# Altium PCB PiMX8MP_r0.3.PcbDoc (part 8 of 10)
Units mm, origin at the board's own origin, x right, y up, seen from the top; angles counter-clockwise.
Board outline 55 x 40 mm, 10 copper layers (Top Layer, Layer 1, Layer 2, Layer 3, Layer 4, Layer 5, Layer 6, Layer 7, Layer 8, Bottom Layer), stack 1.472 mm thick; 545 components, 477 nets, 2606 pads, 2278 vias.
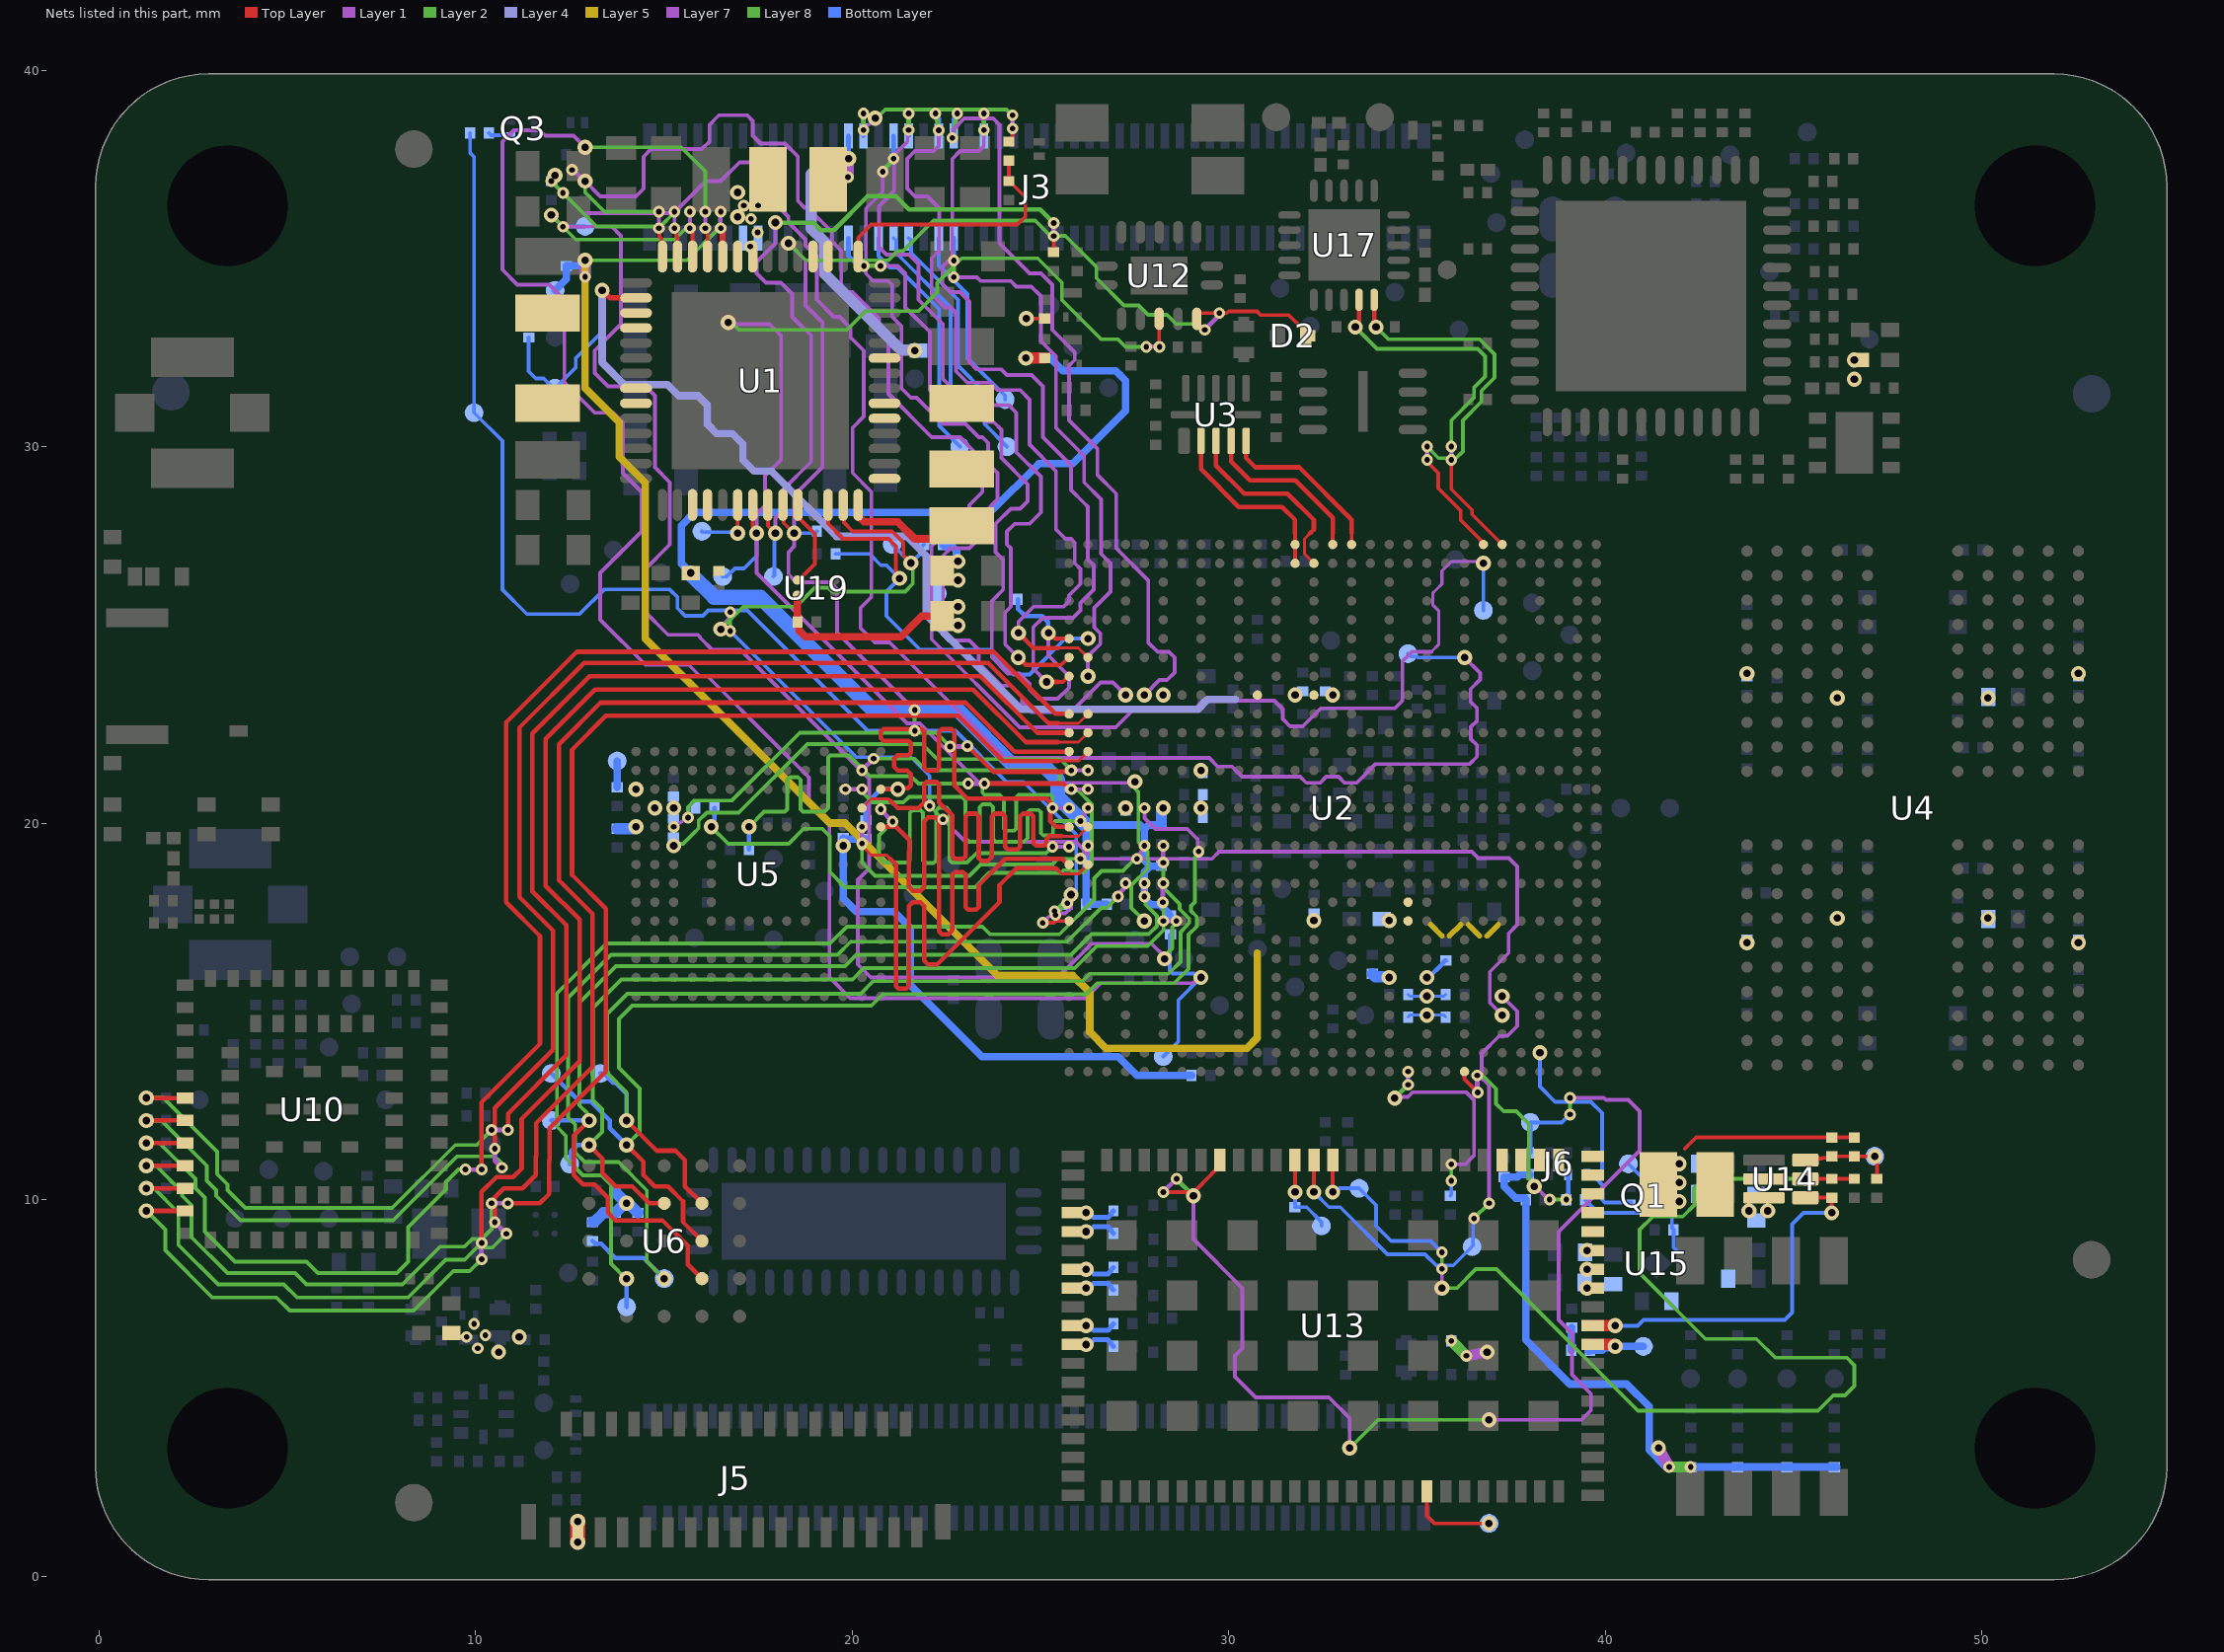
[diagram p16: the nets of this part, all layers, seen from the top]

## Via types
v1: diameter 0.4, hole 0.2, Top Layer to Bottom Layer, tented both sides, 946 vias
v2: diameter 0.31, hole 0.15, Top Layer to Layer 1, tented both sides, 321 vias
v3: diameter 0.31, hole 0.15, Layer 8 to Bottom Layer, tented both sides, 315 vias
v4: diameter 0.31, hole 0.15, Layer 1 to Layer 2, tented both sides, 257 vias
v5: diameter 0.31, hole 0.15, Layer 7 to Layer 8, tented both sides, 198 vias
v6: diameter 0.4, hole 0.2, Layer 2 to Layer 7, tented both sides, 169 vias
v7: diameter 0.31, hole 0.15, Top Layer to Layer 1, tented top, 72 vias

## Nets (pads, with @x,y where several pads share a name; then routed paths per layer and width w, separated by ;. In a path a pad name is that pad's centre, name@x,y a point inside that pad or via, vN(x,y) a via of type N, cw(c..) or ccw(c..) an arc to the next point about the centre after c; other vN are vias at no path point) (continued)
PMIC_32K_OUT: TP10.TP U1.7 U2.J25 U12.11 | length 41.5
  Top Layer w0.1: U1.7@17.362,28.454 17.362,27.886 17.462,27.786 v1(17.462,27.704) ; U12.11@28.153,33.399 28.153,32.664 v2(28.162,32.654)
  Layer 1 w0.12: v4(27.812,32.654) v2(28.162,32.654)
  Layer 2 w0.1: v6(16.712,33.304) 16.793,33.304 16.993,33.104 19.862,33.104 20.362,33.604 21.762,33.604 22.262,34.104 22.262,34.354 22.912,35.004 24.929,35.004 25.571,34.363 25.571,33.896 26.612,32.854 27.062,32.854 27.262,32.654 v4(27.812,32.654) ; v6@27.512,21.004 27.512,20.923 27.6,20.835 27.6,19.5 27.85,19.25 27.85,18.792 27.412,18.354 27.412,17.754 v1(27.762,17.404)
  Layer 7 w0.1: v6(16.712,33.304) 16.762,33.254 17.812,33.254 18.112,32.954 18.112,29.654 17.687,29.229 17.687,28.429 17.462,28.204 v1(17.462,27.704) 17.462,26.654 21.462,22.654 21.796,22.654 23.376,21.074 25.462,21.074 27.482,21.074 v6(27.512,21.104)
  Bottom Layer w0.1: TP10.TP@16.562,26.554 16.67,26.554 16.888,26.772 17.13,26.772 17.462,27.104 v1(17.462,27.704)
PMIC_INT_B: R4.2 TP11.TP U1.13 U2.D6 | length 40.1
  Top Layer w0.1: U1.13@19.762,28.454 19.782,28.435 19.782,27.985 20.012,27.754 21.062,27.754 21.362,27.454 21.362,27.113 v1(21.562,26.913)
  Layer 2 w0.1: v6(16.512,25.154) 17.112,25.754 18.512,25.754 19.012,26.254 19.362,26.254 19.462,26.154 21.407,26.154 21.612,26.359 21.612,26.863 v1(21.562,26.913)
  Layer 7 w0.1: v6(16.512,25.154) 16.512,25.225 16.725,25.437 16.725,25.567 v5(16.765,25.607) ; v5(22.412,20.104) 23.012,19.504 25.462,19.504 25.946,19.504 26.396,19.054 29.554,19.054 29.744,19.244 36.456,19.244 36.626,19.074 37.442,19.074 37.662,18.854 37.662,17.304 37.432,17.074 37.432,16.554 36.932,16.054 36.932,15.234 v1(37.262,14.904)
  Layer 8 w0.1: v3@16.765,25.107 16.763,25.108 v5(16.765,25.607) v5(16.765,25.607) ; v3@22.059,20.454 v3@22.059,20.458 ; v3(22.059,20.462) v3@22.059,20.458 ; v5(22.412,20.104) v3@22.059,20.458
  Bottom Layer w0.1: v3(16.762,25.104) 20.112,21.754 21.562,21.754 22.059,21.258 v3(22.059,20.462) ; TP11.TP@21.062,27.404 21.066,27.404 21.558,26.913 v1(21.562,26.913) 21.827,27.178 21.827,27.319 R4.2@21.912,27.404
PMIC_ON_REQ: R18.1 TP15.TP U1.39 U2.F22 | length 51.5
  Top Layer w0.1: v2(16.102,35.804) 16.102,35.748 16.162,35.688 U1.39@16.162,35.054
  Layer 1 w0.1: v2(16.102,35.804) v4(16.102,36.244)
  Layer 2 w0.1: v6(12.912,37.954) 15.462,37.954 16.102,37.314 v4(16.102,36.244)
  Layer 7 w0.1: v6(12.912,37.954) 12.601,38.266 11.848,38.266 11.709,38.404 11.012,38.404 10.712,38.104 10.712,34.704 11.112,34.304 11.962,34.304 12.662,33.604 12.662,33.454 12.362,33.154 12.362,31.704 13.162,30.904 13.662,30.904 13.912,30.654 13.912,29.299 14.412,28.799 14.412,27.754 13.312,26.654 13.312,25.404 14.512,24.204 15.662,24.204 15.962,23.904 16.162,23.904 17.912,22.154 18.85,21.217 18.85,20.55 19.4,20 19.4,15.9 19.95,15.35 21.012,15.35 25.462,15.35 26.2,15.35 26.604,15.754 29.054,15.754 29.204,15.904 v1(29.262,15.904)
  Bottom Layer w0.1: TP15.TP@28.262,13.804 28.662,14.204 28.662,15.304 v1(29.262,15.904) 29.181,15.904 29.081,16.004 28.512,16.004 28.432,16.084 28.432,17.032 R18.1@28.45,17.05
PMIC_POR_B: D2.2 R3.1 R17.1 R157.1 TP12.TP U1.9 U2.J29 U12.13 | length 70.4
  Top Layer w0.1: U1.9@18.162,28.454 18.179,28.438 18.179,27.982 18.457,27.704 v1(18.462,27.704) ; v2(25.062,17.354) 25.362,17.354 25.412,17.404 U2.J29@25.762,17.404 ; U12.13@29.153,33.399 29.153,33.481 29.222,33.55 v2(29.75,33.55) 29.95,33.55 30,33.6 30.61,33.6 30.611,33.599 30.751,33.599 30.85,33.5 31.591,33.5 31.916,33.175 31.95,33.175 32.1,33.025 D2.2@32.1,32.9
  Layer 1 w0.1: v2(25.062,17.354) v4(25.373,17.666)
  Layer 1 w0.12: v4(29.362,33.104) 29.714,33.456 29.714,33.514 v2(29.75,33.55)
  Layer 2 w0.1: v6(18.312,35.404) 18.321,35.404 18.771,34.954 20.962,34.954 21.212,35.204 21.362,35.204 22.162,36.004 24.862,36.004 25.262,35.604 25.662,35.604 26.487,34.779 26.487,34.479 27.212,33.754 27.612,33.754 27.862,33.504 28.362,33.504 28.604,33.263 29.147,33.263 29.305,33.104 v4(29.362,33.104) ; v4(25.373,17.666) v6(25.812,18.104)
  Layer 7 w0.1: v6(18.312,35.404) 18.762,34.954 18.762,33.754 19.212,33.304 19.212,29.454 18.462,28.704 v1(18.462,27.704) 18.462,27.354 18.312,27.204 18.312,26.604 18.512,26.404 19.412,26.404 19.6,26.217 19.6,25.067 v5(21.662,23.004) ; v5(25.401,17.563) 25.441,17.604 25.661,17.604 25.812,17.754 v6(25.812,18.104)
  Layer 8 w0.1: v3(21.662,22.454) v5(21.662,23.004) ; v5(25.401,17.563) v3(25.712,17.874)
  Bottom Layer w0.1: R157.1@9.857,38.329 9.857,37.804 9.962,37.699 TP12.TP@9.962,30.904 10.712,30.154 10.712,26.204 11.362,25.554 12.762,25.554 13.417,26.209 15.157,26.209 15.362,26.004 15.362,25.714 15.567,25.509 16.039,25.509 16.184,25.654 17.212,25.654 20.412,22.454 v3(21.662,22.454) 22.746,22.454 24.1,21.1 24.55,21.1 25.95,19.7 25.95,18.107 25.717,17.874 v3(25.712,17.874) ; v1(18.462,27.704) 19.012,27.704 R3.1@19.062,27.754
PMIC_RTC_RESET: TP18.TP U1.6 | length 1.7
  Top Layer w0.1: v1(16.962,27.704) U1.6@16.962,28.454
  Bottom Layer w0.1: TP18.TP@16.012,27.754 16.037,27.729 16.937,27.729 v1(16.962,27.704)
PMIC_SCL: R176.1 TP8.TP U1.41 U2.AC8 | length 49.7
  Top Layer w0.1: v2(15.282,35.804) 15.322,35.764 15.322,35.619 15.362,35.579 U1.41@15.362,35.054
  Layer 1 w0.1: v2(15.282,35.804) v4(15.282,36.244)
  Layer 2 w0.1: v6(12.112,37.204) 12.135,37.182 12.135,36.932 13.212,35.854 14.914,35.854 15.282,36.223 v4(15.282,36.244)
  Layer 7 w0.1: v6(12.112,37.204) 12.135,37.182 12.135,36.932 v5(12.323,36.743) 12.862,36.204 15.262,36.204 16.112,37.054 16.511,37.054 17.011,37.554 17.757,37.554 17.962,37.349 17.962,36.954 17.862,36.854 17.862,36.549 18.312,36.099 18.312,35.954 18.762,35.504 18.762,35.354 19.062,35.054 19.062,33.904 19.512,33.454 19.662,33.454 19.962,33.154 19.962,32.904 20.312,32.554 20.312,30.804 20.012,30.504 20.012,29.304 20.512,28.804 20.512,26.012 20.223,25.723 20.223,25.18 20.602,24.802 20.998,24.802 24.066,21.734 25.462,21.734 29.482,21.734 29.712,21.504 30.094,21.504 30.364,21.234 31.899,21.234 32.059,21.074 32.432,21.074 32.592,21.234 32.916,21.234 33.076,21.074 33.399,21.074 33.899,21.574 35.181,21.574 36.399,21.574 36.592,21.768 36.592,22.074 36.432,22.234 36.432,22.558 36.592,22.718 36.592,23.056 36.422,23.226 36.422,23.564 36.677,23.819 36.677,23.989 v1(36.262,24.404)
  Layer 8 w0.1: v3(12.012,37.054) v5(12.323,36.743)
  Bottom Layer w0.1: TP8.TP@34.762,24.504 34.839,24.428 34.997,24.428 35.021,24.404 v1(36.262,24.404)
PMIC_SDA: R175.1 TP9.TP U1.42 U2.AH7 | length 50.4
  Top Layer w0.1: v2(14.872,35.804) 14.883,35.794 14.883,35.584 14.943,35.524 14.943,35.074 U1.42@14.962,35.054
  Layer 1 w0.1: v2(14.872,35.804) v4(14.872,36.244)
  Layer 2 w0.1: v6(12.912,37.054) 12.912,36.754 13.422,36.244 v4(14.872,36.244)
  Layer 7 w0.08: 35.379,24.554 35.582,24.758 35.582,25.634 35.415,25.802 35.415,26.104 35.513,26.203 35.513,26.206 35.662,26.354 35.662,26.704 35.912,26.954 36.712,26.954 v1(36.762,26.904)
  Layer 7 w0.1: v5(12.562,37.354) 12.587,37.354 12.887,37.054 v6(12.912,37.054) 13.312,36.654 14.262,36.654 14.462,36.854 14.462,36.859 ; 14.462,37.254 14.462,37.704 14.662,37.904 16.012,37.904 16.212,38.104 16.212,38.554 16.462,38.804 17.212,38.804 17.362,38.654 17.362,38.259 17.567,38.054 18.212,38.054 18.557,37.709 18.557,36.528 18.736,36.349 18.817,36.349 19.462,35.704 19.462,35.454 19.712,35.204 19.712,34.204 19.812,34.104 20.012,34.104 20.712,33.404 20.712,33.204 20.962,32.954 20.962,31.404 22.112,30.254 22.862,30.254 23.212,29.904 23.212,29.404 23.462,29.154 23.462,28.804 23.112,28.454 23.112,27.904 22.812,27.604 22.362,27.604 22.112,27.354 22.112,24.888 24.45,22.55 25.462,22.55 27,22.55 27.504,23.054 29.112,23.054 29.312,23.254 31.212,23.254 31.432,23.034 31.432,22.768 31.626,22.574 31.966,22.574 32.446,23.054 34.412,23.054 34.612,23.254 34.612,24.304 34.862,24.554 35.379,24.554 ; 14.462,36.859 14.462,37.254
  Layer 8 w0.1: v5(12.562,37.354) 12.587,37.354 12.887,37.054 v6(12.912,37.054)
  Bottom Layer w0.1: TP9.TP@36.762,25.654 v1(36.762,26.904)
  other v3: 12.912,37.054
PMIC_STBY_REQ: TP14.TP U1.40 U2.J24 | length 44.4
  Top Layer w0.1: v2(15.692,35.804) 15.692,35.748 15.762,35.678 U1.40@15.762,35.054
  Layer 1 w0.1: v2(15.692,35.804) v4(15.692,36.244)
  Layer 1 w0.12: v2(28.262,17.404) v4(28.612,17.404)
  Layer 2 w0.1: v6(12.012,36.154) 12.662,35.504 15.287,35.504 15.692,35.909 v4(15.692,36.244) ; v6@28.25,16.431 28.5,16.681 28.5,17.241 28.612,17.353 v4(28.612,17.404)
  Layer 7 w0.1: v6(12.012,36.154) v5(12.323,35.843) 13.623,35.843 13.862,35.604 13.862,33.254 13.162,32.554 13.162,31.959 13.517,31.604 14.512,31.604 14.762,31.354 14.762,29.454 15.162,29.054 15.162,27.404 14.462,26.704 14.462,25.654 15.112,25.004 15.904,25.004 15.962,24.946 15.962,24.927 16.284,24.604 17.029,24.604 19.479,22.154 20.452,21.181 20.452,18.802 20.15,18.5 20.15,16.25 20.5,15.9 21.012,15.9 25.462,15.9 26.362,16.8 27.95,16.8 28.3,16.45 v6(28.3,16.4)
  Layer 8 w0.1: v6(12.012,36.154) v5(12.323,35.843)
  Bottom Layer w0.1: v6(12.012,36.154) 12.312,35.854 TP14.TP@12.912,35.854
  other v3: 12.012,36.154
PMIC_VINT: C24.1 U1.4
PMIC_XTAL_IN: U1.10 U19.2 | length 2.4
  Top Layer w0.1: U1.10@18.562,28.454 18.562,28.134 19.01,27.687 19.01,26.883 U19.2@18.581,26.454
PMIX_LX1: L3.1 U1.36 U1.37
PMIX_LX2: L1.1 U1.45 U1.46
PMIX_LX3: L5.1 U1.31 U1.32
PMIX_LX4: L2.1 U1.19 U1.20
PMIX_LX5: L4.1 U1.15
PMIX_LX6: L6.1 U1.50 U1.51
PWR_LED: Q3.1 R157.2 | length 0.6
  Bottom Layer w0.1: R157.2@10.357,38.329 10.407,38.279 Q3.1@10.937,38.279
QSPIA_DQS: C109.1 U2.R26
  other v1: 27.262,20.404
R_SNSP1: NT2.1 R2.1 TP6.TP U1.38 | length 42.2
  Top Layer w0.15: v2(16.512,35.804) 16.562,35.754 U1.38@16.562,35.054
  Layer 1 w0.1: v2(16.512,35.804) v4(16.512,36.244)
  Layer 2 w0.1: v6(12.912,34.954) 15.612,34.954 16.492,35.834 16.492,36.224 v4(16.512,36.244)
  Layer 5 w0.2: v6(12.912,34.954) 12.912,31.554 13.812,30.654 13.812,29.739 14.512,29.039 14.512,24.904 19.412,20.004 19.812,20.004 23.862,15.954 25.862,15.954 26.312,15.504 26.312,14.454 26.742,14.024 30.482,14.024 30.762,14.304 NT2.1@30.762,16.554
  Layer 7 w0.3: v5(12.912,34.514) v6(12.912,34.954)
  Layer 8 w0.3: v5(12.912,34.514) v6(12.912,34.954)
  Bottom Layer w0.2: TP6.TP@12.112,34.154 12.412,34.454 R2.1@12.412,34.804 12.74,34.804 12.89,34.954 v6(12.912,34.954)
  other v3: 12.912,34.954
R_SNSP2: NT1.1 R1.1 TP3.TP U1.44 | length 30
  Top Layer w0.15: v1(13.362,34.154) 13.375,34.154 13.575,33.954 U1.44@14.262,33.954
  Layer 4 w0.2: v1(13.362,34.154) 13.362,32.239 13.947,31.654 15.097,31.654 15.397,31.354 15.912,31.354 16.154,31.112 16.154,30.597 16.397,30.354 16.812,30.354 17.104,30.062 17.104,29.647 17.397,29.354 17.847,29.354 19.579,27.622 21.445,27.622 21.962,27.104 21.962,25.554 21.954,25.547 24.476,23.024 29.182,23.024 29.442,23.284 NT1.1@30.182,23.284
  Bottom Layer w0.1: R1.1@11.412,32.904 11.412,32.004 11.599,31.818 11.81,31.818 12.073,31.554 TP3.TP@12.112,31.554 12.662,32.104 12.662,32.354 13.362,33.054 v1(13.362,34.154)
"reserved SD_DAT4": J3.68 TP98.TP | length 6.6
  Bottom Layer w0.1: J3.68@21.502,35.544 21.566,35.481 21.566,35.151 22.812,33.904 22.812,32.154 23.512,31.454 23.512,30.604 TP98.TP@24.112,30.004
"reserved SD_DAT5": J3.64 TP97.TP | length 5
  Bottom Layer w0.1: J3.64@22.302,35.544 22.302,34.814 23.062,34.054 23.062,32.354 24.062,31.354 TP97.TP@24.062,31.254
"reserved SD_DAT6": J3.72 TP100.TP | length 6.6
  Bottom Layer w0.1: J3.72@20.702,35.544 20.702,35.064 21.012,34.754 21.212,34.754 22.312,33.654 22.312,30.554 TP100.TP@22.862,30.004
"reserved SD_DAT7": J3.70 TP99.TP | length 5
  Bottom Layer w0.1: J3.70@21.102,35.544 21.166,35.481 21.166,35.151 22.612,33.704 22.612,31.513 22.812,31.313 TP99.TP@22.812,31.254
SAI2_MCLK: U2.AJ15 U3.4 | length 4.6
  Top Layer w0.1: U2.AJ15@32.762,27.404 32.762,27.704
  Top Layer w0.12: U3.4@30.062,30.154 30.062,29.604 30.562,29.104 31.767,29.104 32.762,28.11 32.762,27.704
SAI2_RXD0: U2.AJ14 U3.5 | length 4.6
  Top Layer w0.1: U2.AJ14@33.262,27.404 33.262,27.704
  Top Layer w0.12: U3.5@30.462,30.154 30.462,29.704 30.712,29.454 31.87,29.454 33.262,28.062 33.262,27.704
SAI2_TX/RX_FS: U2.AH17 U2.AJ17 U3.2 | length 5
  Top Layer w0.1: U2.AH17@31.762,26.904 U2.AJ17@31.762,27.404 31.762,27.704
  Top Layer w0.12: U3.2@29.262,30.154 29.262,29.404 30.262,28.404 31.412,28.404 31.762,28.054 31.762,27.854 31.762,27.704
SAI2_TXD0: U2.AH16 U3.3 | length 5.2
  Top Layer w0.08: 32.162,27.704 32.012,27.554 32.012,27.154 U2.AH16@32.262,26.904
  Top Layer w0.12: U3.3@29.662,30.154 29.662,29.504 30.412,28.754 31.562,28.754 32.262,28.054 32.262,27.804 32.162,27.704
SCI_I2C_SCL: R38.1 R149.2 U2.AJ7 U17.10 | length 11.5
  Top Layer w0.1: v2(35.267,29.654) 35.267,29.603 35.567,29.303 35.567,28.896 36.162,28.301 36.162,28.054 36.693,27.524 36.693,27.515 36.762,27.445 U2.AJ7@36.762,27.404
  Top Layer w0.12: U17.10@33.862,33.904 33.862,33.229 v1(33.912,33.179)
  Layer 1 w0.12: v2(35.267,29.654) v4(35.267,30.004)
  Layer 2 w0.1: v1(33.912,33.179) 34.237,32.854 36.662,32.854 37.062,32.454 37.062,31.832 36.712,31.482 36.712,31.199 36.217,30.704 36.217,29.878 36.039,29.699 35.572,29.699 v4(35.267,30.004)
SCI_I2C_SDA: R37.1 R150.2 U2.AJ6 U17.9 | length 10.5
  Top Layer w0.1: v2(35.912,29.654) 35.912,28.873 36.462,28.323 36.462,28.204 U2.AJ6@37.262,27.404
  Top Layer w0.12: v1(33.362,33.179) 33.362,33.194 33.462,33.294 U17.9@33.462,33.904
  Layer 1 w0.12: v2(35.912,29.654) v4(35.912,30.004)
  Layer 2 w0.1: v1(33.362,33.179) 33.937,32.604 36.612,32.604 36.812,32.404 36.812,31.865 36.512,31.565 36.512,31.304 35.912,30.704 v4(35.912,30.004)
SD2_CD_B: J3.76 R25.1 U2.AD29 | length 21.5
  Top Layer w0.1: 25.462,24.904 U2.AD29@25.762,24.904
  Top Layer w0.12: v1(25.212,25.054) 25.248,25.054 25.398,24.904 25.462,24.904
  Layer 7 w0.1: v5(20.752,34.804) 21.212,34.804 21.412,34.604 21.412,33.704 22.062,33.054 22.062,31.504 22.612,30.954 23.262,30.954 23.562,30.654 23.762,30.654 23.962,30.454 23.962,29.704 24.662,29.004 24.662,28.554 24.462,28.354 24.212,28.354 23.812,27.954 23.812,27.204 24.012,27.004 24.012,26.204 23.712,25.904 23.712,24.404 24.137,23.979 24.437,23.979 24.712,23.704 24.712,23.554 24.962,23.304 25.462,23.304 25.762,23.604 25.762,23.904 25.212,24.454 v1(25.212,25.054)
  Layer 8 w0.12: v3@20.276,34.768 v3(20.312,34.804) v5(20.752,34.804)
  Bottom Layer w0.12: J3.76@19.902,35.544 19.902,35.07 20.131,34.841 20.276,34.841 v3(20.312,34.804) ; R25.1@24.4,25.95 24.41,25.94 24.41,25.69 24.6,25.5 25.05,25.5 25.205,25.345 25.205,25.061 v1(25.212,25.054)
SD2_CLK: J3.57 U2.AB29 | length 21
  Top Layer w0.1: 25.462,23.754 25.598,23.754 25.748,23.904 U2.AB29@25.762,23.904
  Top Layer w0.12: v1(25.162,23.754) 25.462,23.754
  Layer 7 w0.1: v5(23.502,38.414) 23.502,37.994 23.362,37.854 22.867,37.854 22.662,37.649 22.662,37.254 22.662,35.055 22.397,34.789 22.397,34.319 22.612,34.104 22.862,34.104 23.112,33.854 23.112,32.254 23.312,32.054 23.962,32.054 24.112,31.904 24.762,31.904 25.062,31.604 25.062,30.254 25.812,29.504 25.812,28.854 26.162,28.504 26.262,28.404 26.262,27.004 26.412,26.854 26.412,26.204 26.062,25.854 26.062,25.654 25.862,25.454 25.462,25.454 25.062,25.454 24.812,25.204 24.812,24.104 v1(25.162,23.754)
  Layer 8 w0.12: v5(23.502,38.414) v3(23.502,38.854)
  Bottom Layer w0.12: J3.57@23.502,38.254 v3(23.502,38.854)
SD2_CMD: J3.62 U2.AB28 | length 14.8
  Layer 7 w0.1: v5(22.702,34.504) 23.312,34.504 23.412,34.404 24.212,34.404 24.362,34.254 24.757,34.254 25.012,33.999 25.012,32.804 25.412,32.404 25.412,30.504 26.162,29.754 26.162,29.054 26.612,28.604 26.612,27.154 26.862,26.904 26.862,26.154 26.432,25.724 26.432,25.201 26.592,25.041 26.592,24.768 26.262,24.438 v1(26.262,23.904)
  Layer 8 w0.12: v5(22.702,34.504) v3(22.702,34.944)
  Bottom Layer w0.12: v3(22.702,34.944) J3.62@22.702,35.544
SD2_DATA0: J3.63 U2.AC28 | length 21.5
  Top Layer w0.08: 25.462,24.654 26.012,24.654 U2.AC28@26.262,24.404
  Top Layer w0.12: v1(24.417,25.054) 24.817,24.654 25.462,24.654
  Layer 7 w0.1: v5(22.302,38.404) 22.302,37.994 22.162,37.854 21.667,37.854 21.462,37.649 21.462,36.86 21.667,36.654 21.995,36.654 22.312,36.337 22.312,35.204 22.112,35.004 22.112,34.054 22.462,33.704 22.612,33.704 22.762,33.554 22.762,32.004 23.062,31.704 23.662,31.704 23.862,31.504 24.462,31.504 24.712,31.254 24.712,30.054 25.412,29.354 25.412,27.804 25.662,27.554 25.812,27.554 25.912,27.454 25.912,26.904 26.062,26.754 26.062,26.354 25.762,26.054 25.762,25.904 25.612,25.754 24.817,25.754 24.417,25.354 v1(24.417,25.054)
  Layer 8 w0.12: v3(22.212,38.854) v5(22.302,38.404)
  Bottom Layer w0.12: v3(22.212,38.854) 22.212,38.803 22.302,38.713 J3.63@22.302,38.254
SD2_DATA1: J3.67 U2.AC29 | length 20.5
  Top Layer w0.1: 25.462,24.204 25.548,24.204 25.748,24.404 U2.AC29@25.762,24.404
  Top Layer w0.12: v1(24.412,24.404) 24.612,24.204 25.462,24.204
  Layer 7 w0.1: v5(21.502,38.414) 21.467,38.379 21.467,38.109 21.117,37.759 21.117,36.804 21.012,36.699 21.012,36.69 20.712,36.39 20.712,35.604 20.712,35.304 20.912,35.104 21.512,35.104 21.762,34.854 21.762,33.904 22.412,33.254 22.412,31.804 22.862,31.354 23.462,31.354 23.712,31.104 24.162,31.104 24.362,30.904 24.362,29.854 25.012,29.204 25.012,28.254 24.712,27.954 24.317,27.954 24.112,27.749 24.112,27.404 24.212,27.304 24.212,25.754 24.062,25.604 24.062,24.754 v1(24.412,24.404)
  Layer 8 w0.12: v5(21.502,38.414) v3(21.502,38.854)
  Bottom Layer w0.12: J3.67@21.502,38.254 v3(21.502,38.854)
SD2_DATA2: J3.69 U2.AA26 | length 23.1
  Layer 7 w0.1: v5(20.812,37.304) 20.812,36.773 20.367,36.327 20.367,34.6 20.562,34.404 20.962,34.404 21.062,34.304 21.062,33.454 21.312,33.204 21.312,31.554 21.562,31.304 21.712,31.304 22.412,30.604 23.012,30.604 23.362,30.254 23.462,30.254 23.612,30.104 23.612,29.554 23.862,29.304 23.862,28.604 23.512,28.254 23.512,27.704 23.112,27.304 22.612,27.304 22.412,27.104 22.412,25.004 22.562,24.854 23.112,24.854 23.362,24.604 23.362,24.254 23.962,23.654 24.212,23.654 24.512,23.354 24.512,23.204 24.762,22.954 25.462,22.954
  Layer 7 w0.115: 25.462,22.954 25.812,22.954 26.6,23.742 26.925,23.742 v1(27.262,23.404)
  Layer 8 w0.12: v5(20.812,37.304) 20.812,37.334 21.102,37.624 v3(21.102,37.654)
  Bottom Layer w0.12: v3(21.102,37.654) J3.69@21.102,38.254
SD2_DATA3: J3.61 U2.AA25 | length 21
  Layer 7 w0.1: v5(22.662,38.204) 22.678,38.22 22.678,38.42 22.977,38.719 23.747,38.719 23.912,38.554 23.912,35.404 24.712,34.604 25.012,34.604 25.312,34.304 25.312,33.104 25.912,32.504 25.912,32.304 25.762,32.154 25.762,30.704 26.512,29.954 26.512,29.254 27.012,28.754 27.012,27.304 27.862,26.454 27.862,24.804 28.112,24.554 28.412,24.554 28.562,24.404 28.562,24.004 28.362,23.804 28.162,23.804 v1(27.762,23.404)
  Layer 8 w0.12: v5@22.662,38.24 v5(22.662,38.204) v3(22.792,38.854)
  Bottom Layer w0.12: J3.61@22.702,38.254 22.702,38.713 22.792,38.803 v3(22.792,38.854)
SD2_RESET: R7.1 U1.12 U2.AD28 | length 12.9
  Top Layer w0.1: U1.12@19.362,28.454 19.362,27.954 19.762,27.554 20.962,27.554 21.162,27.354 21.162,26.686 21.262,26.586 v1(21.262,26.504)
  Bottom Layer w0.1: R7.1@19.562,27.154 20.462,27.154 20.762,26.854 20.912,26.854 v1(21.262,26.504) 20.912,26.154 20.912,25.504 21.811,24.606 23.644,24.606 24.296,23.954 24.712,23.954 25.662,24.904 v1(26.262,24.904)
SD2_VSEL: R6.1 R153.1 U1.29 | length 6.8
  Top Layer w0.1: U1.29@20.162,35.054 20.162,35.554 20.507,35.899 24.389,35.899 24.6,36.111 24.6,36.632 24.194,37.038 R6.1@24.162,37.038 ; R6.1@24.162,37.076 R153.1@24.162,37.604
SD3_CLK: R59.1 U2.U28 U5.M6 | length 12.5
  Layer 1 w0.1: v4(25.822,21.404) v2(26.262,21.404)
  Layer 2 w0.1: v1(15.262,19.404) 15.31,19.452 15.509,19.452 15.811,19.754 15.926,19.868 15.926,20.068 16.137,20.279 16.987,20.279 18.812,22.104 21.862,22.104 22.262,21.704 25.522,21.704 v4(25.822,21.404)
SD3_CMD: U2.U29 U5.M5 | length 12.1
  Top Layer w0.12: v2(23.062,22.054) 23.747,21.369 25.635,21.369 25.645,21.38 25.737,21.38 U2.U29@25.762,21.404
  Layer 1 w0.1: v2(15.262,19.904) v4(15.641,20.152)
  Layer 1 w0.12: v4(22.604,22.036) v2@23.036,22.036 ; v2@23.026,22.018 v2(23.062,22.054)
  Layer 2 w0.1: v4(15.641,20.152) 15.641,20.433 15.812,20.604 16.812,20.604 18.612,22.404 22.236,22.404 v4(22.604,22.036)
SD3_DATA0: R58.1 U2.P29 U5.A3 | length 14.4
  Top Layer w0.12: U5.A3@20.762,20.904 v1(21.212,20.904) 21.236,20.928 21.486,20.928 21.562,21.004 21.562,21.304 21.462,21.404 21.212,21.404 21.117,21.499 21.117,21.716 21.206,21.804 21.492,21.804 21.562,21.875 21.562,22.119 21.492,22.189 20.833,22.189 20.762,22.26 20.762,22.434 20.833,22.504 21.842,22.504 21.912,22.434 21.912,21.475 21.983,21.404 22.242,21.404 22.312,21.475 22.312,22.434 22.383,22.504 22.642,22.504 22.712,22.434 22.712,21.004 23.062,20.654 25.162,20.654 25.262,20.554 25.262,20.054 25.412,19.904 U2.P29@25.762,19.904
  Bottom Layer w0.12: R58.1@20.362,20.084 20.362,20.504 20.762,20.904 v1(21.212,20.904)
SD3_DATA1: U2.N29 U5.A4 | length 12.2
  Layer 1 w0.1: v4(25.322,19.374) v2(25.762,19.374)
  Layer 1 w0.12: v2@20.768,20.349 v4(21.073,20.043)
  Layer 2 w0.1: v4(21.073,20.043) 20.712,19.682 20.712,19.104 20.862,18.954 21.37,18.954 21.462,18.954 21.532,19.024 21.532,20.277 21.602,20.347 21.812,20.347 21.882,20.277 21.882,19.013 21.952,18.943 22.162,18.943 22.232,19.013 22.232,20.338 22.302,20.408 22.512,20.408 22.582,20.338 22.582,19.024 22.652,18.954 23.052,18.954 23.302,19.204 25.152,19.204 v4(25.322,19.374)
  other v2: 20.762,20.374
SD3_DATA2: U2.M29 U5.A5 | length 14.7
  Top Layer w0.12: U5.A5@20.762,19.904 21.171,19.904 21.522,19.554 21.522,19.255 21.512,19.245 21.512,18.304 21.612,18.204 21.812,18.204 21.912,18.304 21.912,20.054 22.012,20.154 22.212,20.154 22.312,20.054 22.312,17.125 22.383,17.054 22.562,17.054 22.662,17.154 22.662,18.634 22.733,18.704 22.942,18.704 23.012,18.634 23.012,17.775 23.083,17.704 23.292,17.704 23.362,17.775 23.362,18.354 24.062,19.054 25.462,19.054 25.577,19.054 25.728,18.904 U2.M29@25.762,18.904
SD3_DATA3: U2.R29 U5.B2 | length 12.4
  Layer 1 w0.1: v4(25.322,20.404) v2(25.762,20.404)
  Layer 1 w0.12: v2@20.268,21.41 v4(20.573,21.716)
  Layer 2 w0.1: v4(20.573,21.716) 21.661,21.716 21.972,21.404 25.412,21.404 25.512,21.304 25.512,21.154 25.412,21.054 23.521,21.054 23.462,20.996 23.462,20.813 23.521,20.754 23.912,20.754 24.027,20.64 24.027,19.863 24.086,19.804 24.304,19.804 24.362,19.863 24.362,20.696 24.421,20.754 25.262,20.754 25.322,20.694 v4(25.322,20.404)
  other v2: 20.262,21.404
SD3_DATA4: U2.R28 U5.B3 | length 11.9
  Layer 1 w0.1: v4(26.062,20.058) v2(26.262,20.404)
  Layer 1 w0.12: v4(19.822,20.904) v2@20.255,20.904
  Layer 2 w0.1: v4(19.822,20.904) 20.192,20.904 20.542,20.554 21.362,20.554 21.512,20.704 22.912,20.704 23.012,20.604 23.012,19.604 23.112,19.504 23.272,19.504 23.322,19.504 23.392,19.574 23.392,20.433 23.462,20.503 23.672,20.503 23.742,20.433 23.742,19.574 23.812,19.504 23.979,19.504 24.562,19.504 24.662,19.604 24.662,20.296 24.721,20.354 24.954,20.354 25.012,20.296 25.012,19.738 25.071,19.679 25.279,19.679 25.337,19.738 25.337,19.999 25.396,20.058 v4(26.062,20.058)
  other v2: 20.262,20.904
SD3_DATA5: U2.P28 U5.B4 | length 14.7
  Top Layer w0.08: U5.B4@20.262,20.404 20.507,20.649 20.967,20.649 21.012,20.604 ; 25.562,19.654 26.012,19.654 U2.P28@26.262,19.904
  Top Layer w0.12: 21.012,20.604 21.212,20.404 21.762,20.404 21.912,20.554 21.912,21.034 21.983,21.104 22.242,21.104 22.312,21.034 22.312,20.554 22.662,20.204 22.662,19.125 22.733,19.054 22.942,19.054 23.012,19.125 23.012,20.184 23.083,20.254 23.292,20.254 23.362,20.184 23.362,19.075 23.433,19.004 23.612,19.004 23.712,19.104 23.712,20.184 23.783,20.254 23.992,20.254 24.062,20.184 24.062,19.375 24.133,19.304 24.392,19.304 24.462,19.375 24.462,20.184 24.533,20.254 24.742,20.254 24.812,20.184 24.812,19.475 24.883,19.404 25.096,19.404 25.162,19.47 25.162,19.584 25.233,19.654 25.562,19.654
SD3_DATA6: U2.N28 U5.B5 | length 7.5
  Layer 1 w0.1: v4(26.062,19.058) v2(26.262,19.404)
  Layer 1 w0.12: v4(20.262,19.464) v2@20.262,19.897
  Layer 2 w0.1: v4(20.262,19.464) 20.262,18.954 20.612,18.604 21.012,18.604 23.112,18.604 23.412,18.904 25.312,18.904 25.466,19.058 v4(26.062,19.058)
  other v2: 20.262,19.904
SD3_DATA7: U2.M28 U5.B6 | length 14.7
  Top Layer w0.08: U5.B6@20.262,19.404 20.512,19.154 20.915,19.154 21.012,19.058 ; 25.462,18.754 25.557,18.659 26.017,18.659 U2.M28@26.262,18.904
  Top Layer w0.12: 21.012,19.058 21.162,18.908 21.162,15.675 21.233,15.604 21.442,15.604 21.512,15.675 21.512,17.804 21.612,17.904 21.812,17.904 21.912,17.804 21.912,16.354 22.012,16.254 22.262,16.254 23.912,17.904 23.912,18.354 24.362,18.804 25.412,18.804 25.462,18.754
SD3_RESET: R60.1 U2.T28 U5.K5 | length 15
  Layer 1 w0.1: v4(25.822,20.904) v2(26.262,20.904)
  Layer 2 w0.1: v1(16.262,19.904) 16.712,19.454 18.312,19.454 18.712,19.854 19.212,19.854 19.412,19.654 19.412,18.704 19.812,18.304 21.012,18.304 23.262,18.304 23.637,18.679 25.462,18.679 25.537,18.679 25.612,18.754 25.812,18.754 25.862,18.704 26.162,18.704 26.362,18.904 26.362,20.504 26.002,20.864 25.862,20.864 v4(25.822,20.904)
  Bottom Layer w0.12: v1@16.342,20.06 R60.1@16.342,20.404
SD3_STROBE: R61.2 U2.T29 U5.H5 | length 12.7
  Top Layer w0.08: U2.T29@25.742,20.924 U2.T29@25.762,20.904
  Top Layer w0.12: v2(23.512,21.054) 25.612,21.054 U2.T29@25.742,20.924
  Layer 1 w0.12: v4(23.08,21.054) v2(23.512,21.054)
  Layer 2 w0.1: v1(17.262,19.904) 17.662,20.304 18.158,20.304 18.208,20.304 18.278,20.374 18.278,21.151 18.348,21.221 18.558,21.221 18.628,21.151 18.628,20.374 18.698,20.304 19.262,20.304 19.35,20.392 19.362,20.404 19.362,21.746 19.421,21.804 19.912,21.804 20.462,21.254 21.562,21.254 21.762,21.054 v4(23.08,21.054)
  Bottom Layer w0.12: R61.2@17.262,19.304 v1(17.262,19.904)
SD_PWR_ON: C33.1 J3.75 U1.23 | length 8.8
  Layer 4 w0.3: v6(19.912,37.654) 19.893,37.635 19.307,37.635 18.912,37.241 18.912,35.804 19.262,35.454 19.262,34.604 21.293,32.574 21.643,32.574 v1(21.662,32.554)
  Layer 7 w0.3: v5(19.892,37.163) v5(19.892,37.163) 19.894,37.636 v6(19.912,37.654)
  Layer 8 w0.3: v5(19.892,37.163) v3@19.892,37.654
  Bottom Layer w0.12: v3(19.902,37.654) J3.75@19.902,38.254
SD_VDD_Override: J3.73 R153.2 | length 6
  Top Layer w0.1: R153.2@24.162,38.104 24.15,38.117 24.187,38.117 24.26,38.189 v2@24.26,38.44
  Layer 1 w0.12: v2(24.262,38.454) v4(24.262,38.804)
  Layer 2 w0.1: v6(20.613,38.726) 20.651,38.726 20.879,38.954 24.099,38.954 24.249,38.804 v4(24.262,38.804)
  Layer 7 w0.1: v5(20.302,38.414) v6(20.613,38.726)
  Layer 8 w0.12: v5(20.302,38.414) v3(20.302,38.854)
  Bottom Layer w0.12: J3.73@20.302,38.254 v3(20.302,38.854)
SDIO_CLK: U2.W28 U10.33 | length 43.1
  Top Layer w0.08: 25.462,22.154 26.012,22.154 U2.W28@26.262,22.404
  Top Layer w0.12: v1(1.262,9.704) U10.33@2.287,9.704 ; v2(10.162,8.854) 10.162,10.204 10.558,10.6 11,10.6 11.227,10.827 11.227,12.152 12.762,13.687 12.762,17.439 11.862,18.339 11.862,22.244 13.172,23.554 23.212,23.554 24.612,22.154 25.462,22.154
  Layer 1 w0.12: v4(10.162,8.422) v2(10.162,8.854)
  Layer 2 w0.1: v1(1.262,9.704) 1.762,9.204 1.762,8.654 3.012,7.404 4.712,7.404 5.062,7.054 8.362,7.054 9.412,8.104 9.845,8.104 v4(10.162,8.422)
SDIO_CMD: R107.1 U2.W29 U10.28 | length 40.2
  Top Layer w0.12: v1(1.262,12.704) U10.28@2.287,12.704 ; v2(10.862,11.854) 10.862,12.287 12.412,13.837 12.412,17.294 11.512,18.194 11.512,22.389 13.027,23.904 23.412,23.904 24.912,22.404 U2.W29@25.762,22.404
  Layer 1 w0.12: v4(10.43,11.854) v2(10.862,11.854)
  Layer 2 w0.1: v1(1.262,12.704) 1.712,12.704 3.137,11.279 3.137,10.679 3.412,10.404 3.412,10.254 3.887,9.779 7.787,9.779 9.462,11.454 10.03,11.454 v4(10.43,11.854)
SDIO_DATA_0: R111.1 U2.Y29 U10.30 | length 43.1
  Top Layer w0.12: v1(1.262,11.504) U10.30@2.287,11.504 ; v2(10.162,10.804) 10.162,12.587 11.712,14.137 11.712,17.004 10.812,17.904 10.812,22.679 12.687,24.554 23.762,24.554 24.052,24.264 24.052,24.255 25.403,22.904 U2.Y29@25.762,22.904
  Layer 1 w0.12: v4(9.73,10.804) v2(10.162,10.804)
  Layer 2 w0.1: v1(1.262,11.504) 1.612,11.504 2.562,10.554 2.562,10.304 2.812,10.054 2.812,9.154 3.612,8.354 5.512,8.354 5.812,8.054 7.912,8.054 8.212,8.354 8.212,9.271 9.212,10.271 9.212,10.466 9.551,10.804 v4(9.73,10.804)
SDIO_DATA_1: R110.1 U2.Y28 U10.29 | length 42.1
  Top Layer w0.08: 25.462,22.654 26.012,22.654 U2.Y28@26.262,22.904
  Top Layer w0.12: v1(1.262,12.104) U10.29@2.287,12.104 ; v2(10.512,11.354) 10.512,12.437 12.062,13.987 12.062,17.149 11.162,18.049 11.162,22.534 12.882,24.254 23.612,24.254 25.212,22.654 25.462,22.654
  Layer 1 w0.12: v2(10.512,11.354) 10.512,11.038 v4(10.7,10.85)
  Layer 2 w0.1: v1(1.262,12.104) 1.662,12.104 2.862,10.904 2.862,10.504 3.112,10.254 3.112,10.104 3.762,9.454 7.812,9.454 9.512,11.154 10.512,11.154 10.66,11.007 10.66,10.89 v4(10.7,10.85)
SDIO_DATA_2: R109.1 U2.V29 U10.32 | length 42.4
  Top Layer w0.12: v1(1.262,10.304) U10.32@2.287,10.304 ; v2(10.512,9.404) 10.512,10.062 10.75,10.3 11.25,10.3 11.6,10.65 11.6,11.15 ; 11.612,11.154 11.612,12.037 13.112,13.537 13.112,17.584 12.212,18.484 12.212,22.099 13.317,23.204 23.012,23.204 24.312,21.904 U2.V29@25.762,21.904
  Layer 1 w0.12: v2(10.512,9.404) v4(10.818,9.099)
  Layer 2 w0.1: v1(1.262,10.304) 1.462,10.304 2.112,9.654 2.112,8.804 3.162,7.754 4.912,7.754 5.262,7.404 8.212,7.404 9.212,8.404 9.713,8.404 10.036,8.727 10.059,8.727 10.06,8.728 10.447,8.728 v4(10.818,9.099)
SDIO_DATA_3: R108.1 U2.V28 U10.31 | length 42.4
  Top Layer w0.08: 25.462,21.654 26.012,21.654 U2.V28@26.262,21.904
  Top Layer w0.12: v1(1.262,10.904) U10.31@2.287,10.904 ; v2(10.862,9.904) 11.704,9.904 11.95,10.15 11.95,11.05 ; 11.962,11.054 11.962,11.904 13.462,13.404 13.462,17.729 12.562,18.629 12.562,21.954 13.462,22.854 22.812,22.854 24.012,21.654 25.462,21.654
  Layer 1 w0.12: v4(10.43,9.904) v2(10.862,9.904)
  Layer 2 w0.1: v1(1.262,10.904) 1.285,10.882 1.535,10.882 2.212,10.204 2.212,10.104 2.462,9.854 2.462,9.004 3.412,8.054 5.212,8.054 5.512,7.754 8.062,7.754 9.062,8.754 9.562,8.754 9.707,8.754 9.912,8.959 10.167,8.959 10.43,9.222 v4(10.43,9.904)
SYS_RST: R159.2 TP16.TP U1.8 | length 20.6
  Top Layer w0.1: U1.8@17.762,28.454 17.762,27.9 17.958,27.704 v1(17.962,27.704) ; R159.2@25.353,35.169 v2(25.353,35.595)
  Layer 1 w0.12: v2(25.353,35.595) v4(25.353,35.945)
  Layer 2 w0.12: v6(17.962,35.954) 18.962,35.954 19.162,35.754 19.512,35.754 20.412,36.654 21.162,36.654 21.512,36.304 24.993,36.304 v4(25.353,35.945)
  Layer 7 w0.1: v1(17.962,27.704) 17.962,28.104 18.162,28.304 18.162,28.854 18.912,29.604 18.912,32.954 18.412,33.454 18.412,34.054 18.112,34.354 17.712,34.354 17.462,34.604 17.462,34.904 17.962,35.404 v6(17.962,35.954)
  Bottom Layer w0.1: TP16.TP@17.912,26.554 17.937,26.579 17.937,27.679 v1(17.962,27.704)
TPU_1V8_LDO_EN: Q1.3 R134.2 R135.1 TP91.TP U15.3 | length 5.3
  Bottom Layer w0.1: R135.1@39.462,10.004 39.462,9.989 39.547,9.904 39.562,9.904 39.812,9.654 41.212,9.654 41.321,9.763 ; TP91.TP@40.612,10.954 40.912,10.654 41.125,10.654 41.337,10.442 Q1.3@41.337,10.104 ; Q1.3@41.412,10.029 Q1.3@41.337,10.104 ; U15.3@41.912,8.629 41.812,8.729 R134.2@41.812,9.204 41.771,9.246 41.771,9.546 41.662,9.654 41.429,9.654 41.321,9.763 ; 41.321,9.763 41.321,10.088 Q1.3@41.337,10.104
TPU_1V8_LDO_IN: C190.1 R133.2 U15.4
TPU_3V3_BCK_IN: C185.1 R129.2 U14.6
  other v1: 43.812,9.704 44.312,9.704
TPU_AON: C182.1 C191.1 R127.2 R131.2 U13.54 U14.1 U15.1 | length 10.7
  Top Layer w0.1: U14.1@45.312,10.054 R131.2@46.012,10.054 v1(46.012,9.654)
  Top Layer w0.3: U13.54@39.662,6.654 v1(40.262,6.654)
  Bottom Layer w0.1: v1(40.262,6.654) 40.862,6.654 41.012,6.804 44.762,6.804 44.962,7.004 44.962,9.354 45.262,9.654 v1(46.012,9.654)
  Bottom Layer w0.2: R127.2@39.092,6.004 39.092,6.584 C182.1@39.112,6.604
TPU_CLKREQ: R128.2 TP87.TP U13.78 | length 2.2
  Top Layer w0.1: v1(31.762,10.204) U13.78@31.762,11.054
  Bottom Layer w0.1: R128.2@31.762,9.804 32.07,9.804 32.462,9.413 TP87.TP@32.462,9.304 ; R128.2@31.762,9.869 v1(31.762,10.204)
TPU_EN: J6.6 R135.2 U2.A8 | length 6.7
  Top Layer w0.1: U2.A8@36.262,13.404 36.262,13.199 v2(36.612,12.849)
  Layer 1 w0.12: v4(36.6,13.3) 36.6,13.104 36.6,12.862 v2(36.612,12.849)
  Layer 2 w0.1: v4(36.6,13.3) 36.64,13.26 36.79,13.26 37.1,12.95 37.1,12.55 37.301,12.349 37.633,12.349 37.967,12.016 37.967,11.354 37.962,11.349 37.962,10.563 38.112,10.413 v6(38.112,10.354)
  Layer 7 w0.1: v6(38.112,10.354) 38.142,10.354 38.492,10.004 v5(38.522,10.004)
  Layer 8 w0.1: v5(38.522,10.004) v3(38.962,10.004)
  Bottom Layer w0.12: v3(38.962,10.004) 39.012,10.055 J6.6@39.012,10.665
TPU_INTR: TP88.TP U2.E6 U13.77 | length 13.7
  Top Layer w0.1: v1(32.262,10.204) U13.77@32.262,11.054
  Layer 7 w0.1: v5(36.912,9.904) 36.912,10.977 36.912,11.432 36.912,13.038 36.846,13.104 36.72,13.23 36.72,13.887 37.183,14.35 37.4,14.35 37.662,14.612 37.662,15.004 v1(37.262,15.404)
  Layer 8 w0.1: v3(36.512,9.504) v5(36.912,9.904)
  Bottom Layer w0.1: v1(32.262,10.204) 32.662,9.804 32.962,9.804 34.212,8.554 35.212,8.554 35.512,8.254 35.962,8.254 36.487,8.779 36.487,9.479 v3(36.512,9.504)
TPU_PCIe_CLK_N: R141.2 U13.10 | length 0.9
  Bottom Layer w0.13: v1(26.212,6.654) 26.285,6.654 26.41,6.529 26.796,6.529 26.872,6.606 26.872,6.634 R141.2@26.942,6.704
TPU_PCIe_CLK_P: R140.2 U13.11 | length 0.9
  Bottom Layer w0.13: v1(26.212,6.154) 26.285,6.154 26.41,6.279 26.796,6.279 26.872,6.203 26.872,6.174 R140.2@26.942,6.104
TPU_PCIe_RX_N: R139.2 U13.8 | length 0.9
  Bottom Layer w0.13: v1(26.212,7.654) 26.285,7.654 26.41,7.779 26.796,7.779 26.872,7.703 26.872,7.674 R139.2@26.942,7.604
TPU_PCIe_RX_P: R138.2 U13.7 | length 0.9
  Bottom Layer w0.13: v1(26.212,8.154) 26.285,8.154 26.41,8.029 26.796,8.029 26.872,8.106 26.872,8.134 R138.2@26.942,8.204
TPU_PCIe_TX_N: R137.2 U13.4 | length 0.9
  Bottom Layer w0.13: v1(26.212,9.654) 26.285,9.654 26.41,9.529 26.796,9.529 26.872,9.606 26.872,9.634 R137.2@26.942,9.704
TPU_PCIe_TX_P: R136.2 U13.5 | length 0.9
  Bottom Layer w0.13: v1(26.212,9.154) 26.285,9.154 26.41,9.279 26.796,9.279 26.872,9.203 26.872,9.174 R136.2@26.942,9.104
TPU_PGOOD4: TP85.TP U13.37 | length 2.4
  Top Layer w0.1: U13.37@35.262,2.254 35.262,1.604 35.462,1.404 v1(36.912,1.404)
TPU_PMIC_EN: R127.1 TP84.TP U13.53 | length 2.1
  Top Layer w0.3: U13.53@39.662,6.154 40.185,6.154 40.235,6.104 v1(40.262,6.104)
  Bottom Layer w0.2: R127.1@39.562,5.974 R127.1@39.592,6.004 39.922,6.004 39.989,6.071 40.229,6.071 v1(40.262,6.104) TP84.TP@41.012,6.104
TPU_PSU_FB: C186.2 R130.1 R132.2 TP90.TP U14.3 | length 2.5
  Top Layer w0.1: U14.3@45.312,11.054 45.354,11.096 45.754,11.096 45.771,11.113 45.971,11.113 C186.2@46.012,11.154 v1(47.154,11.154) 47.212,11.096 R132.2@47.212,10.554
TPU_PSU_SW: L10.1 U14.5
TPU_RST_L: C189.1 R131.1 TP86.TP U13.76 U14.2 | length 33.6
  Top Layer w0.1: v1(32.762,10.204) U13.76@32.762,11.054 ; v1(45.312,10.554) R131.1@46.012,10.554 C189.1@46.612,10.554
  Layer 2 w0.1: v6(35.662,7.654) 36.062,7.654 36.562,8.154 37.112,8.154 40.867,4.4 45.65,4.4 46.054,4.804 46.362,4.804 46.612,5.054 46.612,5.604 46.412,5.804 44.512,5.804 44.012,6.304 42.662,6.304 40.912,8.054 40.912,9.204 41.262,9.554 42.057,9.554 42.362,9.859 42.362,10.304 42.612,10.554 v1(45.312,10.554)
  Layer 7 w0.1: v6@35.662,7.724 v5(35.662,8.164)
  Layer 8 w0.1: v5(35.662,8.164) v3(35.662,8.604)
  Bottom Layer w0.1: v1(32.762,10.204) 32.843,10.204 32.943,10.304 TP86.TP@33.462,10.304 33.912,9.854 33.912,9.304 34.312,8.904 35.362,8.904 v3(35.662,8.604)
TPU_SD_ALARM: J6.5 Q1.1 U2.B4 | length 6.4
  Bottom Layer w0.1: v1(38.262,13.904) 38.262,13.004 38.662,12.604 39.612,12.604 39.912,12.304 39.912,10.725 39.752,10.565 ; J6.5@39.512,10.665 39.512,10.615 39.562,10.565 39.752,10.565 ; Q1.1@40.687,9.929 39.991,9.929 39.932,9.988 39.932,10.384 39.752,10.565
TPU_SD_ALARM_UB: J6.1 TP89.TP U13.82 | length 33.2
  Top Layer w0.1: v2(28.262,10.204) 29.074,10.204 29.562,10.692 29.562,10.704 29.762,10.904 U13.82@29.762,11.054
  Layer 1 w0.12: v2(28.262,10.204) v4(28.616,10.558)
  Layer 2 w0.1: v6(33.212,3.404) 33.962,4.154 v6(36.912,4.154)
  Layer 2 w0.12: v4(28.616,10.558) 28.616,10.554 29.062,10.108 v6(29.062,10.104)
  Layer 7 w0.1: v6(29.062,10.104) 29.062,8.954 30.362,7.654 30.362,6.054 30.162,5.854 30.162,5.304 30.712,4.754 32.662,4.754 33.212,4.204 v6(33.212,3.404) ; v6(36.912,4.154) 39.362,4.154 39.621,4.413 39.621,4.846 39.112,5.354 39.112,6.454 38.762,6.804 38.762,9.154 40.912,11.304 40.912,12.354 40.612,12.654 40.012,12.654 39.962,12.704 v5(39.062,12.704)
  Layer 8 w0.1: v3(39.062,12.264) v5(39.062,12.704)
  Bottom Layer w0.1: J6.1@38.012,11.245 TP89.TP@38.012,12.054 38.841,12.054 39.051,12.264 v3(39.062,12.264)
TPU_VIN: C183.1 C184.1 C186.1 C187.1 C188.1 L10.2 R130.2 U13.56 U13.57 U13.58 U13.59 U13.60 U13.61 U13.62 U13.63 U13.64 U13.65 U13.66 U13.67 | length 4.6
  Top Layer w0.1: 42.112,11.354 42.412,11.654 C186.1@46.012,11.654 R130.2@46.612,11.654
  other v1: 39.512,7.654 39.512,8.154 39.512,8.654 41.962,9.954 41.962,10.454 41.962,10.954
USB1_D_N: R42.1 R44.1 U2.E10 | length 1
  Bottom Layer w0.08: R44.1@34.762,15.454 34.812,15.404 v1(35.262,15.404) 35.712,15.404 R42.1@35.762,15.454
USB1_D_P: R43.1 R45.1 U2.D10 | length 1
  Bottom Layer w0.08: R45.1@34.762,14.854 34.812,14.904 v1(35.262,14.904) 35.712,14.904 R43.1@35.762,14.854
USB1_TUNE: R46.1 U2.F10 | length 0.7
  Bottom Layer w0.12: v1(35.262,15.904) 35.312,15.904 35.672,16.264 35.672,16.279 35.747,16.354 R46.1@35.762,16.354
USB1_VBUS: R40.2 U2.A11 | length 6
  Layer 1 w0.12: v4(34.762,13.054) v2@34.762,13.304
  Layer 2 w0.12: v6(34.409,12.701) v4(34.762,13.054)
  Layer 7 w0.1: v6(34.409,12.701) 34.443,12.735 34.759,12.735 34.878,12.854 36.307,12.854 36.512,12.649 36.512,11.598 36.512,11.169 36.287,10.944 v5(35.912,10.944)
  Layer 8 w0.1: v3(35.912,10.504) v5(35.912,10.944)
  Bottom Layer w0.1: R40.2@35.887,10.104 35.912,10.129 v3(35.912,10.504)
  other v2: 34.762,13.404
USB2_TUNE: R47.1 U2.F12 | length 0.5
  Bottom Layer w0.3: R47.1@33.812,16.004 33.893,15.924 34.243,15.924 v1(34.262,15.904)
USNOR_QSPI_DATA0: TP57.TP U2.R25 U6.D3 | length 31.5
  Top Layer w0.12: v1(14.012,11.454) 14.462,11.004 14.462,10.654 14.762,10.354 15.112,10.354 15.512,9.954 15.512,9.404 U6.D3@16.012,8.904
  Layer 1 w0.1: v2(27.762,20.404) 27.762,20.138 28.05,19.85 28.9,19.85 29.176,19.574 29.176,19.274 v4(29.2,19.25)
  Layer 2 w0.1: v1(14.012,11.454) 14.362,11.804 14.362,12.954 13.812,13.504 13.812,14.804 14.162,15.154 20.512,15.154 20.812,15.454 26.212,15.454 26.512,15.754 28.554,15.754 28.932,16.132 28.932,17.041 29.152,17.261 29.152,17.45 ; 29.15,17.45 29.15,17.524 29,17.674 29,17.805 29.1,17.905 29.1,19.093 29.2,19.193 v4(29.2,19.25)
  Bottom Layer w0.12: TP57.TP@12.012,13.354 12.762,12.604 13.062,12.604 13.562,12.104 13.562,11.904 v1(14.012,11.454)
USNOR_QSPI_DATA1: TP56.TP U2.L25 U6.D2 | length 28.2
  Top Layer w0.12: v1(13.012,12.104) 12.612,11.704 12.612,10.654 12.862,10.404 13.162,10.404 13.512,10.054 13.512,9.654 13.712,9.454 14.962,9.454 15.637,8.779 15.637,8.279 U6.D2@16.012,7.904
  Layer 1 w0.12: v4(27.762,18.054) v2(27.762,18.404)
  Layer 2 w0.1: 12.955,12.312 12.762,12.504 12.762,15.239 13.727,16.204 19.812,16.204 20.112,16.504 25.812,16.504 26.362,17.054 27.879,17.054 28.092,17.268 28.092,17.541 27.786,17.847 27.786,18.03 v4(27.762,18.054)
  Bottom Layer w0.12: TP56.TP@12.085,12.032 TP56.TP@12.012,12.104 v1(13.012,12.104)
USNOR_QSPI_DATA2: TP55.TP U2.L24 U6.C4 | length 24.9
  Top Layer w0.12: v1(13.012,11.454) 13.372,11.094 13.372,10.704 13.722,10.354 14.162,10.354 14.612,9.904 U6.C4@15.012,9.904
  Layer 1 w0.12: v4(28.25,17.9) 28.25,18.392 v2(28.262,18.404)
  Layer 2 w0.1: v1(13.012,11.454) 13.362,11.804 13.362,12.404 13.112,12.654 13.112,15.094 13.872,15.854 20.012,15.854 20.312,16.154 25.912,16.154 26.492,16.734 27.842,16.734 28.22,17.112 28.272,17.164 28.272,17.878 v4(28.25,17.9)
  Bottom Layer w0.12: TP55.TP@12.5,10.95 12.534,10.984 12.534,11.284 12.704,11.454 v1(13.012,11.454)
USNOR_QSPI_DATA3: TP54.TP U2.N24 U6.D4 | length 27.3
  Top Layer w0.12: v1(14.012,12.104) 14.812,11.304 15.312,11.304 15.562,11.054 15.562,10.354 U6.D4@16.012,9.904
  Layer 1 w0.12: v4(28.262,18.954) v2(28.262,19.404)
  Layer 2 w0.1: v1(14.012,12.104) 14.012,12.854 13.492,13.374 13.492,14.937 14.03,15.474 20.232,15.474 20.562,15.804 26.112,15.804 26.308,16 28.4,16 28.719,16.319 28.719,17.109 28.897,17.286 28.897,17.297 28.95,17.35 28.95,17.47 28.7,17.72 28.7,17.853 28.262,18.291 v4(28.262,18.954)
  Bottom Layer w0.12: TP54.TP@13.312,13.354 13.415,13.354 13.659,13.11 13.715,13.11 14.012,12.814 v1(14.012,12.104)
USNOR_QSPI_SCLK: TP59.TP U2.N25 U6.B2 | length 27.2
  Layer 1 w0.1: v4(27.562,19.054) v2(27.762,19.404)
  Layer 2 w0.1: v1@14,7.9 13.6,8.3 13.6,10.4 13.35,10.65 12.85,10.65 12.4,11.1 12.4,11.7 12.162,11.938 12.162,15.488 13.479,16.804 19.412,16.804 19.862,17.254 23.462,17.254 23.667,17.049 25.507,17.049 26.432,17.974 26.432,18.541 26.626,18.734 27.192,18.734 27.512,19.054 v4(27.562,19.054)
  Bottom Layer w0.12: TP59.TP@14.012,7.154 v1(14.012,7.904)
USNOR_QSPI_SS0_B: R65.1 TP58.TP U2.L26 U6.C2 | length 27.5
  Layer 1 w0.12: v4(27.062,18.054) 27.062,18.106 27.226,18.27 27.226,18.368 v2(27.262,18.404)
  Layer 2 w0.1: 14.6,8.3 14.55,8.35 14.55,10.25 13.8,11 12.9,11 12.65,11.25 12.65,12 12.462,12.188 12.462,15.364 13.603,16.504 19.612,16.504 19.962,16.854 25.712,16.854 26.612,17.754 26.762,17.754 v4(27.062,18.054) ; 14.612,8.304 v1(15.012,7.904)
  Bottom Layer w0.12: R65.1@13.112,8.904 13.187,8.83 13.337,8.83 13.712,8.454 14.462,8.454 v1(15.012,7.904)
VCC1.8_SNVS: C22.1 C72.1 R16.2 R17.2 R18.2 R24.1 R160.2 U1.3 U2.R24 | length 40.8
  Top Layer w0.1: v1(15.712,26.649) 15.762,26.649 C22.1@15.902,26.509
  Top Layer w0.3: v1(24.612,32.354) R160.2@25.112,32.354
  Bottom Layer w0.1: R18.2@28.435,17.55 R18.2@28.45,17.55
  Bottom Layer w0.2: v1(15.712,26.649) 15.462,26.899 15.462,27.904 15.812,28.254 23.662,28.254 24.962,29.554 25.862,29.554 27.262,30.954 27.262,31.755 27.113,31.905 26.998,32.019 25.598,32.019 25.262,32.354 v1(24.612,32.354) ; R24.1@26.762,17.854 R17.2@26.212,17.854 26.212,19.948 26.206,19.954 27.645,19.954 27.762,19.837 ; R16.2@28.212,18.874 28.198,18.86 27.918,18.86 ; C72.1@28.212,19.954 27.879,19.954 27.762,19.837 ; R18.2@28.435,17.55 28.4,17.585 28.4,17.617 28.183,17.834 27.933,17.834 27.762,18.004 27.762,18.704 27.918,18.86 ; 27.762,19.837 27.762,19.015 27.918,18.86
  Bottom Layer w0.3: C72.1@28.212,19.954 28.212,20.327 28.262,20.377 v1(28.262,20.404)
  Bottom Layer w0.4: v1(15.712,26.649) 15.712,26.627 16.334,26.004 17.562,26.004 20.562,23.004 22.812,23.004 24.287,21.529 25.087,21.529 25.462,21.154 25.462,20.698 26.206,19.954
VCC1.8_SYS: C10.1 C11.1 C27.1 C34.1 C35.1 C36.1 C37.1 C38.1 C39.1 C68.1 C115.1 C116.1 C117.1 C118.1 C119.1 C120.1 C142.1 C143.1 C144.1 C145.1 C146.1 C147.1 C198.1 J3.88 J3.90 J5.31 J6.8 L4.2 R4.1 R5.1 R12.2 R13.2 R14.2 R15.2 R19.2 R58.2 R59.2 R60.2 R65.2 R66.2 R83.2 R122.2 R164.2 R185.1 TP4.TP TP44.TP U1.14 U2.AA16 U2.AA19 U2.AA24 U2.J11 U2.J16 U2.K11 U2.R22 U2.U22 U4.F1 U4.F12 U4.G4 U4.G9 U4.T4 U4.T9 U4.U1 U4.U12 U5.C6 U5.M4 U5.N4 U5.P3 U5.P5 U6.B4 U19.3 | length 47.3
  Top Layer w0.1: v1(24.627,33.404) R5.1@25.112,33.404
  Top Layer w0.2: C27.1@18.546,25.339 18.585,25.3 18.585,25.117 18.753,24.949 21.299,24.949 21.85,25.5 C10.1@22.4,25.5 ; C27.1@18.55,25.35 U19.3@18.55,26.055 ; U1.14@20.162,28.454 20.162,28.154 20.312,28.004 21.212,28.004 21.662,27.554 22.567,27.554 L4.2@22.912,27.899
  Top Layer w0.4: v1(12.712,0.904) v1(12.712,1.454)
  Layer 5 w0.14: 35.362,17.309 35.662,17.009 ; 35.857,17.004 36.162,17.309 ; 36.362,17.309 36.662,17.009 ; 36.857,17.004 37.162,17.309
  Layer 7 w0.3: v5(36.312,5.854) v6(36.862,5.954) ; v6(41.412,3.404) v5(41.699,2.902)
  Layer 8 w0.3: v3(35.912,6.254) v5(36.312,5.854) ; v5(41.699,2.902) v3(42.265,2.902)
  Bottom Layer w0.2: C144.1@13.762,20.954 TP44.TP@13.762,21.654 ; v1(19.762,19.404) 19.762,18.004 20.112,17.654 21.112,17.654 21.55,17.217 21.55,15.7 23.45,13.8 25.462,13.8 27.067,13.8 27.562,13.304 R19.2@29.012,13.304 ; C143.1@19.762,19.604 19.782,19.584 R58.2@20.362,19.584 ; R4.1@22.412,27.404 22.412,27.389 22.447,27.354 22.657,27.354 22.774,27.237 22.774,26.993 v1(22.812,26.954) ; J6.8@38.012,10.665 37.722,10.665 37.662,10.605 C198.1@37.312,10.605 37.312,10.354 37.623,10.044 37.857,10.044 37.892,10.009 R185.1@37.892,10.005 37.892,6.274 39.062,5.104 40.562,5.104 41.162,4.504 41.162,3.354 41.615,2.902 v3(42.265,2.902) 46.086,2.902 46.148,2.902 R12.2@46.15,2.9
  Bottom Layer w0.3: R65.2@13.112,9.404 13.149,9.404 13.399,9.654 C146.1@13.712,9.654 13.912,9.854 13.935,9.854 13.985,9.904 v1(14.012,9.904) ; R66.2@13.712,10.254 13.712,10.204 v1(14.012,9.904) ; C142.1@13.762,19.854 14.185,19.854 14.235,19.904 v1(14.262,19.904) ; C147.1@14.312,9.654 14.112,9.854 14.089,9.854 14.039,9.904 v1(14.012,9.904)
  other v1: 43.762,16.829 52.562,16.829 32.262,17.414 34.262,17.414 46.162,17.479 50.162,17.479 14.762,20.404 15.262,20.404 29.262,20.404 14.262,20.904 29.262,21.404 46.162,23.329 50.162,23.329 28.262,23.404 31.762,23.404 43.762,23.979 52.562,23.979 22.812,25.254 22.812,25.754 22.812,26.454 46.612,31.797 46.612,32.304
  other v2: 9.762,6.354 9.962,6.704
  other v3: 17.312,36.054 17.122,36.404 17.502,36.404
  other v4: 10.062,6.054 10.262,6.404
  other v5: 17.293,35.317 17.49,35.696
  other v6: 10.612,5.954 11.162,6.354 32.762,23.404 16.962,36.104 16.962,36.754